# Altium PCB TSAL23.PcbDoc
Units mm, origin at the board's own origin, x right, y up, seen from the top; angles counter-clockwise.
Board outline 52.07 x 66.86 mm, 2 copper layers (Top Layer, Bottom Layer); 41 components, 43 nets, 187 pads, 52 vias.
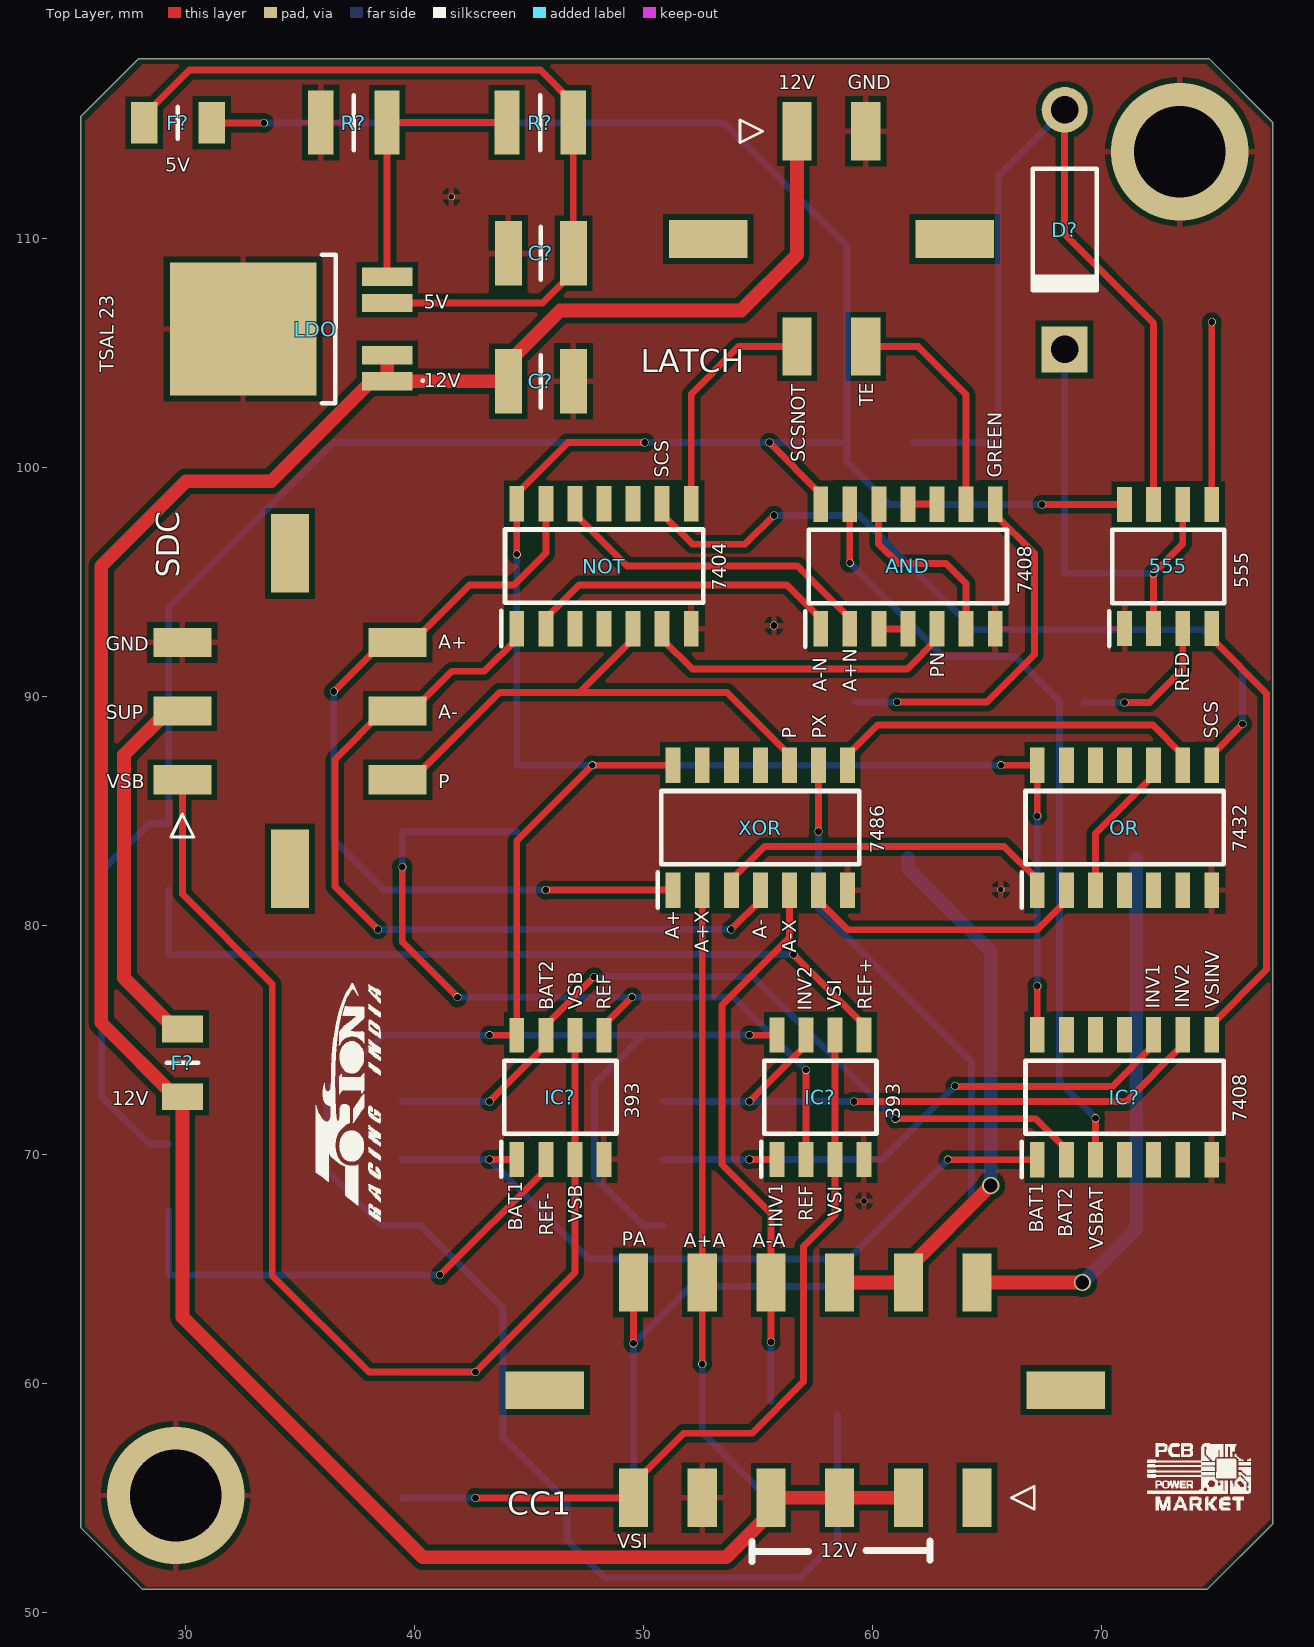
[diagram p0: Top Layer view]
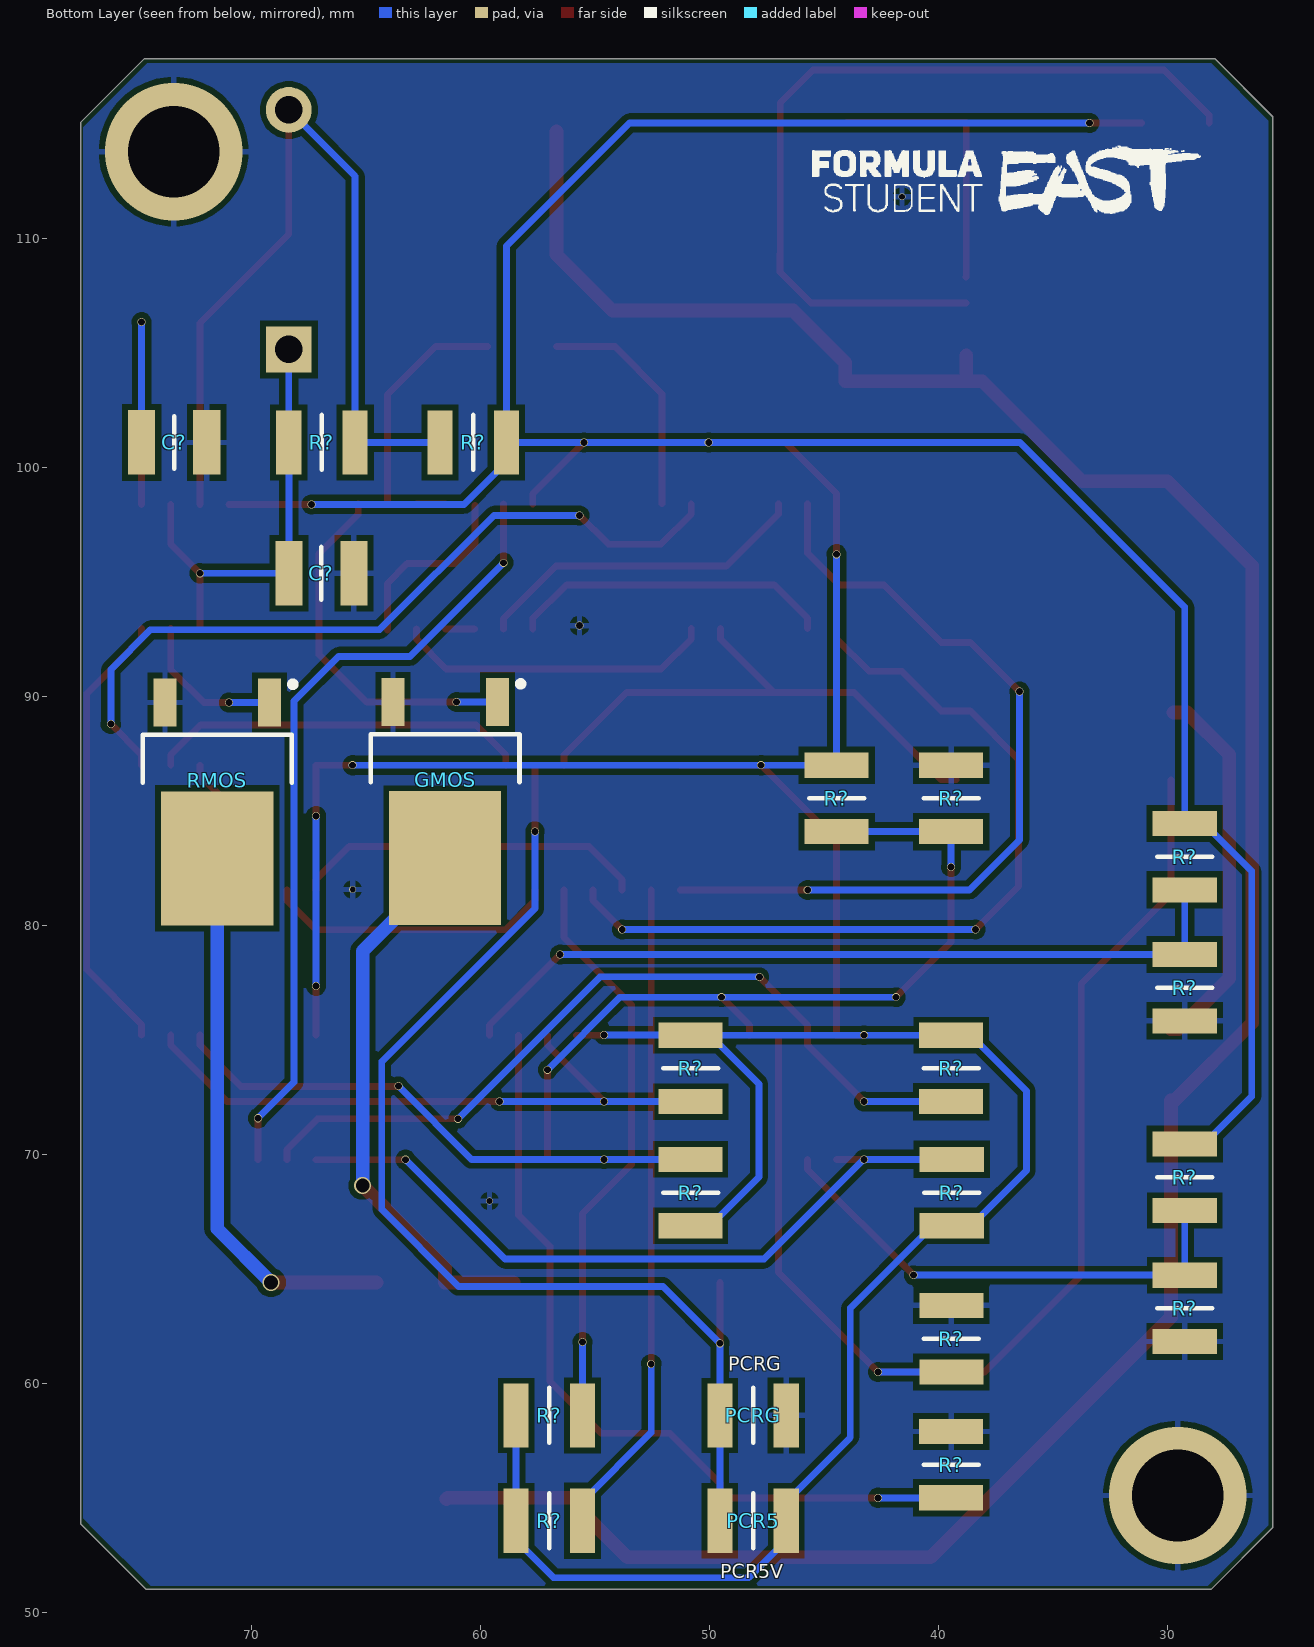
[diagram p1: Bottom Layer view, seen from below]
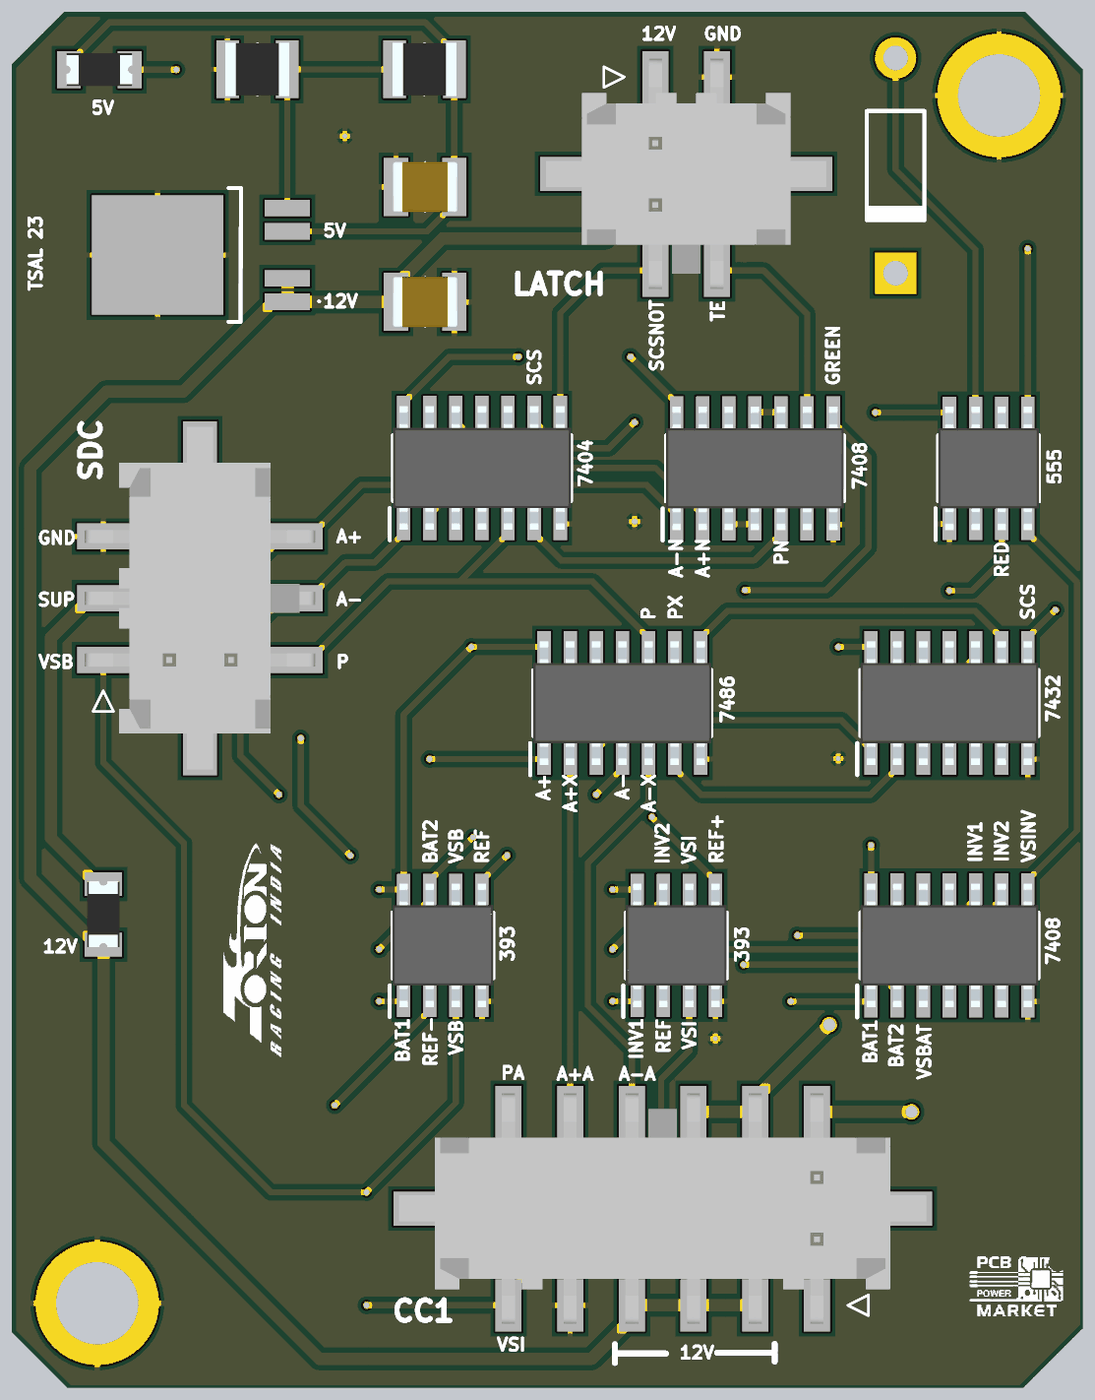
[diagram p2: 3D render of the assembled board from above, using the file's embedded part models]
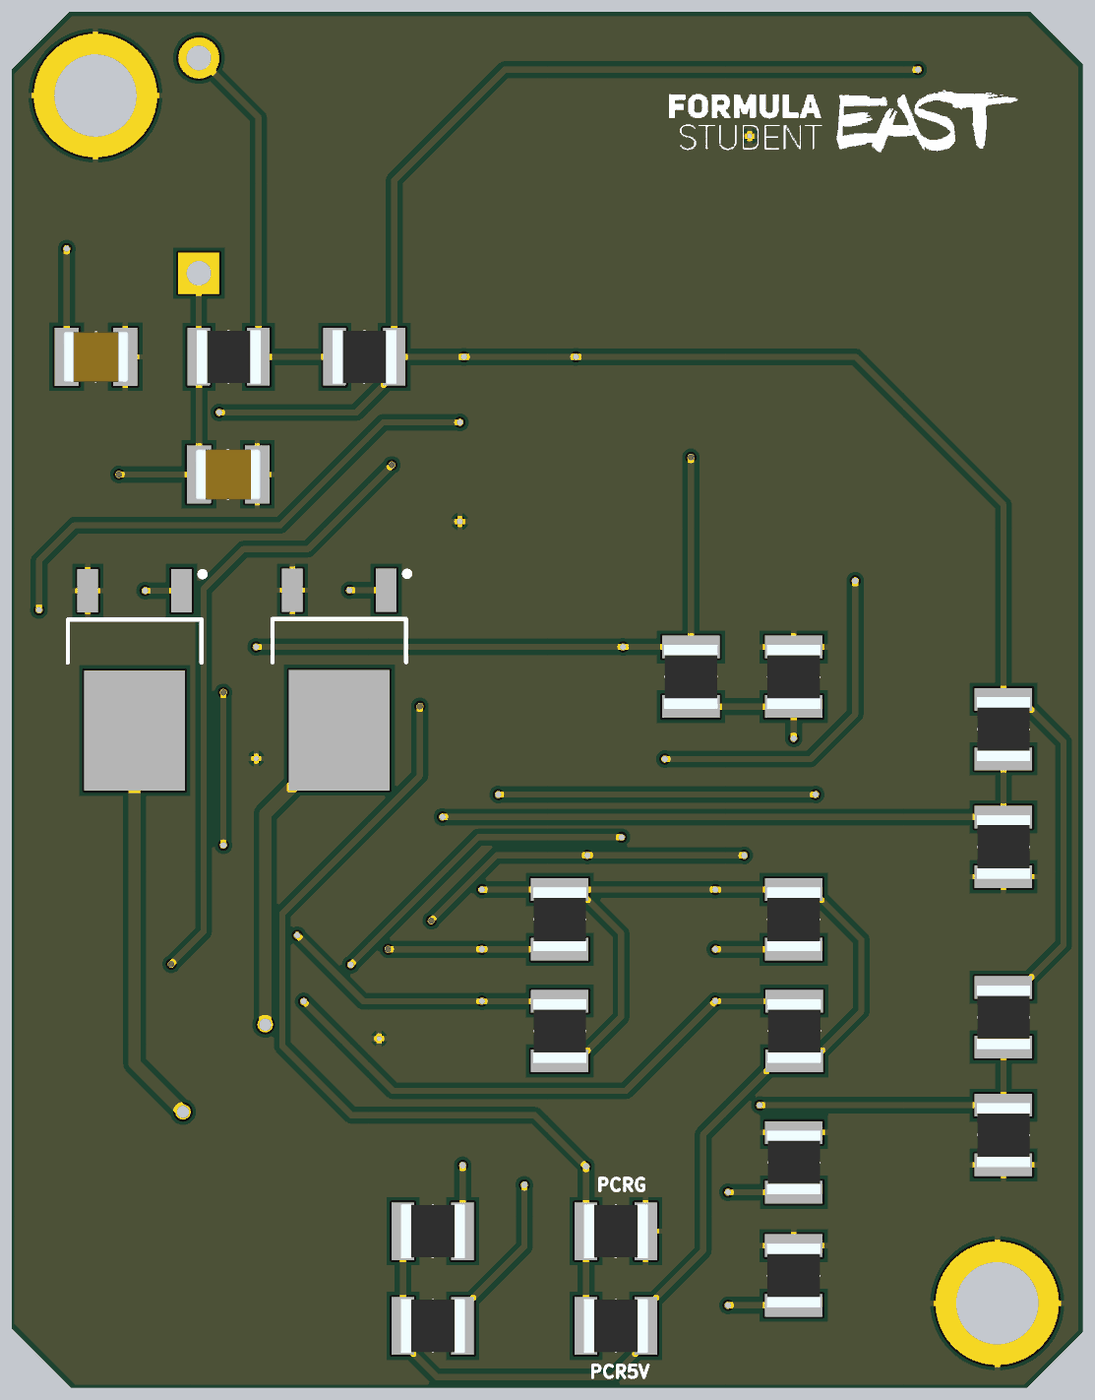
[diagram p3: 3D render of the assembled board from below, using the file's embedded part models]

## Layer stack, top to bottom
Top Solder: solder mask 0.0102, Solder Resist, Dk 3.5
Top Layer: signal copper 0.0356
Dielectric 1: dielectric 0.32, FR-4, Dk 4.8
Bottom Layer: signal copper 0.0356
Bottom Solder: solder mask 0.0102, Solder Resist, Dk 3.5

## Board outline
74.6,51 77.45,53.85 77.47,53.85 77.47,115.062 74.676,117.856 27.94,117.856 25.4,115.316 25.4,53.7 28.1,51

## Design rules (kind name [scope] priority, off if disabled: settings)
Clearance [All] p1: gap=0.254 ignorepadtopadclearanceinfootprint=FALSE except(0: Arc-Hole Track-Hole SMDPad-Hole THPad-Hole Via-Hole Fill-Hole Poly-Hole Region-Hole Text-Hole)
PolygonConnect [All] p1: connectstyle=Relief reliefconductorwidth=0.254 reliefentries=4 polygonreliefangle="90 Angle" airgapwidth=0.254
RoutingVias [All] p1: holewidth=0.3 width=0.35 viastyle="Through Hole" minholewidth=0.3 minwidth=0.35 maxholewidth=0.3 maxwidth=0.35
SolderMaskExpansion [All] p1: expansion=0.102 istentingtop=FALSE
Width [All] p1: maxlimit=0.6 minlimit=0.3 preferedwidth=0.6
30 further rules are at their usual default settings.

## Classes and differential pairs
component class TSAL23: 555 AND C? CC1 D? F? GMOS IC? LATCH LDO NOT OR PCR5 PCRG R? RMOS SDC XOR

## Components (designator, comment, footprint, x,y, rotation, side; value= is the part's Value field where it differs from the comment)
555 "NE555DRG4" SOIC127P600X175-8N 72.898,95.676 r90 top
AND "MC74HC08ADG" SOIC127P600X175-14N 61.534,95.676 r90 top
C? "10uF" CAPC3225X145N 45.5,109.35 r180 top
C? "10uF" CAPC3225X145N 45.5,103.759 r0 top
C? "0.1uF" CAPC3225X145N 73.381,101.092 r0 bottom
C? "10uF" CAPC3225X145N 66.954,95.377 r0 bottom
CC1 "43045-1219" 43045-12YY_181920 57.05,59.7 r0 top
D? "Diode 1N4007" DO-41 68.377,110.386 r270 top
F? "NANOSMDC020F-2" NANOSMDC016F2 29.65,115.05 r180 top
F? "NANOSMDC020F-2" NANOSMDC016F2 29.85,74 r90 top
GMOS "STD10NF10T4" TO228P972X240-3N 61.55,85.4 r270 bottom
IC? "LM393D" SOIC127P600X175-8N 46.355,72.492 r90 top
IC? "MC74HC08ADG" SOIC127P600X175-14N 70.993,72.492 r90 top
IC? "LM393D" SOIC127P600X175-8N 57.712,72.492 r90 top
LATCH "43045-0419" 43045-04YY_181920 58.19,109.983 r180 top
LDO "TLF1963TEATMA1" TLF1963TEATMA1 34.544,106.045 r90 top
NOT "MC74AC04DG" SOIC127P600X175-14N 48.26,95.689 r90 top
OR "MC74HC32ADG" SOIC127P600X175-14N 70.993,84.27 r90 top
PCR5 "10K" RESC3126X60N 48.1,54 r180 bottom
PCRG "10K" RESC3126X60N 48.1,58.6 r0 bottom
R? "10K" RESC3126X60N 39.45,56.45 r270 bottom
R? "10K" RESC3126X60N 39.442,61.946 r270 bottom
R? "10K" RESC3126X60N 39.449,73.754 r90 bottom
R? "10K" RESC3126X60N 50.828,68.33 r270 bottom
R? "1.2K" RESC3126X60N 29.25,83 r90 bottom
R? "10K" RESC3126X60N 29.25,69 r90 bottom
R? "10K" RESC3126X60N 50.828,73.754 r90 bottom
R? "10K" RESC3126X60N 29.25,77.279 r90 bottom
R? "1.2K" RESC3126X60N 29.25,63.273 r90 bottom
R? "10K" RESC3126X60N 39.423,68.33 r270 bottom
R? "10K" RESC3126X60N 57,58.6 r0 bottom
R? "10K" RESC3126X60N 44.45,85.545 r90 bottom
R? "3.9K" RESC3126X60N 39.449,85.545 r270 bottom
R? "10K" RESC3126X60N 57,54 r0 bottom
R? "220K" RESC3126X60N 66.929,101.092 r180 bottom
R? "10K" RESC3126X60N 45.466,115.062 r0 top
R? "3.3K" RESC3126X60N 37.338,115.062 r180 top
R? "220K" RESC3126X60N 60.325,101.092 r180 bottom
RMOS "STD10NF10T4" TO228P972X240-3N 71.501,85.381 r270 bottom
SDC "43045-0619" 43045-06YY_181920 34.545,89.36 r270 top
XOR "MC74HC86ADG" SOIC127P600X175-14N 55.09,84.27 r90 top

## Footprints (in the part's own frame and the unit in brackets; to place one, negate y for a bottom-side part, rotate by r counter-clockwise, add the part's x,y. Pads: shape width x height; smd on the part's side, far side on the other; paste and mask are expansions set on the pad)
43045-04YY_181920 [mm]
  rect 1.27x2.54 smd: 1(1.5,-4.7) 2(-1.5,-4.7) 3(1.5,4.7) 4(-1.5,4.7)
  rect 3.43x1.65 smd: 5(5.385,0) 6(-5.385,0)
  silkscreen extent 3,-5.2 4,-4.2, body extent -6.83,-5.6 6.83,5.6, height 9.96
43045-06YY_181920 [mm]
  rect 1.27x2.54 smd: 1(3,-4.7) 2(0,-4.7) 3(-3,-4.7) 4(3,4.7) 5(0,4.7) 6(-3,4.7)
  rect 3.43x1.65 smd: 7(6.885,0) 8(-6.885,0)
  silkscreen extent 4.5,-5.2 5.5,-4.2, body extent -8.32,-5.6 8.32,5.6, height 9.96
43045-12YY_181920 [mm]
  rect 1.27x2.54 smd: 1(7.5,-4.7) 2(4.5,-4.7) 3(1.5,-4.7) 4(-1.5,-4.7) 5(-4.5,-4.7) 6(-7.5,-4.7) 7(7.5,4.7) 8(4.5,4.7) 9(1.5,4.7) 10(-1.5,4.7) 11(-4.5,4.7) 12(-7.5,4.7)
  rect 3.43x1.65 smd: 13(11.385,0) 14(-11.385,0)
  silkscreen extent 9,-5.2 10,-4.2, body extent -12.83,-5.6 12.83,5.6, height 9.95
CAPC3225X145N [mm]
  rect 1.18x2.82 smd: 1(-1.42,0) 2(1.42,0)
  silkscreen extent 0,-1.15 0,1.15, body extent -1.6,-1.25 1.6,1.25, height 1.45
DO-41 [mm] "Diode, Axial; Body 5.2 x 2.7 mm (LxDia. max), Lead Dia. 0.86 mm (max)"
  round 2 hole 1.2: 1(-5.23,0)
  rect 2x2 hole 1.2: 2(5.23,0)
  silkscreen extent -2.65,-1.4 2.75,1.4
NANOSMDC016F2 [mm]
  rect 1.16x1.81 smd: 1(-1.475,0) 2(1.475,0)
  silkscreen extent 0,-0.69 0,0.69, body extent -1.6,-0.79 1.6,0.79, height 0.82
RESC3126X60N [mm]
  rect 1.1x2.8 smd: 1(-1.45,0) 2(1.45,0)
  silkscreen extent 0,-1.2 0,1.2, body extent -1.55,-1.3 1.55,1.3, height 0.6
SOIC127P600X175-8N [mm]
  rect 1.525x0.65 smd: 1(-2.712,1.905) 2(-2.712,0.635) 3(-2.712,-0.635) 4(-2.712,-1.905) 5(2.712,-1.905) 6(2.712,-0.635) 7(2.712,0.635) 8(2.712,1.905)
  silkscreen extent -3.47,-2.45 1.6,2.58, body extent -3,-2.45 3,2.45, height 1.75
SOIC127P600X175-14N [mm]
  rect 1.55x0.65 smd: 1(-2.725,3.81) 2(-2.725,2.54) 3(-2.725,1.27) 4(-2.725,0) 5(-2.725,-1.27) 6(-2.725,-2.54) 7(-2.725,-3.81) 8(2.725,-3.81) 9(2.725,-2.54) 10(2.725,-1.27) 11(2.725,0) 12(2.725,1.27) 13(2.725,2.54) 14(2.725,3.81)
  silkscreen extent -3.5,-4.33 1.6,4.48, body extent -3,-4.33 3,4.33, height 1.75
TLF1963TEATMA1 [mm]
  rect 0.8x2.2 smd: 1(-2.28,-4.25) 2(-1.14,-4.25) 4(1.14,-4.25) 5(2.28,-4.25)
  rect 5.8x6.4 smd: 3(0,2.05)
  silkscreen extent -3.25,-5.85 3.25,-1.4
TO228P972X240-3N [mm]
  rect 2.1x1 smd: 1(-4.35,2.28) 3(-4.35,-2.28)
  rect 5.85x4.9 smd: 4(2.45,0)
  silkscreen extent -5.27,-3.25 -0.85,3.42

## Part data
555: "Integrated Circuit", Manufacturer_Name="Texas Instruments", Mouser Part Number=595-NE555DRG4, Arrow Part Number=NE555DRG4, Arrow Price/Stock=https://www.arrow.com/en/products/ne555drg4/texas-instruments?region=nac, Datasheet Link=http://www.mouser.com/ds/2/405/ne555-557499.pdf, Height=1.75mm, Manufacturer_Part_Number=NE555DRG4, Mouser Price/Stock=https://www.mouser.co.uk/ProductDetail/Texas-Instruments/NE555DRG4?qs=rLYyFdxB%2FmreBHawQCpQ0Q%3D%3D
AND IC?: "Integrated Circuit", Manufacturer_Name="ON Semiconductor", Mouser Part Number=863-MC74HC08ADG, Arrow Part Number=MC74HC08ADG, Arrow Price/Stock=https://www.arrow.com/en/products/mc74hc08adg/on-semiconductor, Datasheet Link=http://www.onsemi.com/pub/Collateral/MC74HC08A-D.PDF, Height=1.75mm, Manufacturer_Part_Number=MC74HC08ADG, Mouser Price/Stock=https://www.mouser.co.uk/ProductDetail/ON-Semiconductor/MC74HC08ADG?qs=qg33o%252B8vzFqW0duu5mW%2FLA%3D%3D
C? C? C? C?: library part CC1210KKX7R8BB105, "Capacitor", Manufacturer_Name="YAGEO (PHYCOMP)", Mouser Part Number=603-CC121KKX7R8BB105, Arrow Part Number=CC1210KKX7R8BB105, Arrow Price/Stock=https://www.arrow.com/en/products/cc1210kkx7r8bb105/yageo?region=nac, Datasheet Link=https://datasheet.datasheetarchive.com/originals/distributors/Datasheets_SAMA/d9f127a4875522309d99aa7dec79633c.pdf, Height=1.45mm, Manufacturer_Part_Number=CC1210KKX7R8BB105, Mouser Price/Stock=https://www.mouser.com/Search/Refine.aspx?Keyword=603-CC121KKX7R8BB105
CC1: "Connector", Manufacturer_Name=Molex, Mouser Part Number=538-43045-1219, Datasheet Link=https://www.molex.com/pdm_docs/sd/430450218_sd.pdf, Height=9.91mm, Manufacturer_Part_Number=43045-1219, Mouser Price/Stock=https://www.mouser.co.uk/ProductDetail/Molex/43045-1219?qs=359VwiUTsp3iCU2NVYxNVg%3D%3D
D?: "1 Amp General Purpose Rectifier", Code_JEDEC=DO-204-AL, ComponentLink1Description="Manufacturer Link", ComponentLink1URL=http://www.fairchildsemi.com/, ComponentLink2Description=Datasheet, ComponentLink2URL=http://www.fairchildsemi.com/ds/1N%2F1N4001.pdf, DatasheetVersion=1998, LatestRevisionDate=17-Jul-2002, LatestRevisionNote="Re-released for DXP Platform.", PackageDescription="Diode, Axial; Body 5.2 x 2.7 mm (LxDia. max), Lead Dia. 0.86 mm (max)", PackageReference=DO-41, PackageVersion=Aug-1999, Published=8-Jun-2000, Publisher="Altium Limited"
F? F?: "Resettable Fuse", Manufacturer_Name=LITTELFUSE, Mouser Part Number=650-NANOSMDC020F-2, Arrow Part Number=NANOSMDC020F-2, Arrow Price/Stock=https://www.arrow.com/en/products/nanosmdc020f-2/littelfuse, Datasheet Link=https://www.littelfuse.com/~/media/electronics/datasheets/resettable_ptcs/littelfuse_ptc_nanosmdc_datasheet.pdf.pdf, Height=1mm, Manufacturer_Part_Number=NANOSMDC020F-2, Mouser Price/Stock=https://www.mouser.co.uk/ProductDetail/Littelfuse/NANOSMDC020F-2?qs=iK0evp%252BCRRU6agwMt7HYjg%3D%3D
GMOS RMOS: "Integrated Circuit", Manufacturer_Name=STMicroelectronics, Mouser Part Number=511-STD10NF10, Arrow Part Number=STD10NF10T4, Arrow Price/Stock=https://www.arrow.com/en/products/std10nf10t4/stmicroelectronics, Datasheet Link=http://www.st.com/web/en/resource/technical/document/datasheet/CD00002133.pdf, Height=2.4mm, Manufacturer_Part_Number=STD10NF10T4, Mouser Price/Stock=https://www.mouser.co.uk/ProductDetail/STMicroelectronics/STD10NF10T4?qs=El1T93pd01%2FBh%252BX9NfIsIQ%3D%3D
IC? IC?: "Integrated Circuit", Manufacturer_Name=STMicroelectronics, Mouser Part Number=511-LM393D, Arrow Part Number=LM393D, Arrow Price/Stock=https://www.arrow.com/en/products/lm393d/stmicroelectronics?region=europe, Datasheet Link=http://www.st.com/st-web-ui/static/active/en/resource/technical/document/datasheet/CD00000465.pdf, Height=1.75mm, Manufacturer_Part_Number=LM393D, Mouser Price/Stock=https://www.mouser.co.uk/ProductDetail/STMicroelectronics/LM393D?qs=htKRmzjvioSpfPyLiLnV1A%3D%3D
LATCH: "Connector", Manufacturer_Name=Molex, Mouser Part Number=538-43045-0419, Datasheet Link=https://www.molex.com/pdm_docs/sd/430450218_sd.pdf, Height=9.91mm, Manufacturer_Part_Number=43045-0419, Mouser Price/Stock=https://www.mouser.co.uk/ProductDetail/Molex/43045-0419?qs=UeCeOHRHQebVNIQyI9VWWg%3D%3D
LDO: "Integrated Circuit", Manufacturer_Name=Infineon, Mouser Part Number=726-TLF1963TEATMA1, Arrow Part Number=TLF1963TEATMA1, Arrow Price/Stock=https://www.arrow.com/en/products/tlf1963teatma1/infineon-technologies-ag?region=nac, Datasheet Link=https://www.infineon.com/dgdl/Infineon-TLF1963-DS-v01_00-EN.pdf?fileId=5546d46258fc0bc1015969d2981941e0, Height=2.35mm, Manufacturer_Part_Number=TLF1963TEATMA1, Mouser Price/Stock=https://www.mouser.co.uk/ProductDetail/Infineon-Technologies/TLF1963TEATMA1?qs=SiyfpgnvCZluIGE%2FbZiglw%3D%3D
NOT: "Integrated Circuit", Manufacturer_Name="ON Semiconductor", Mouser Part Number=863-MC74AC04DG, Arrow Part Number=MC74AC04DG, Arrow Price/Stock=https://www.arrow.com/en/products/mc74ac04dg/on-semiconductor, Datasheet Link=https://www.onsemi.com/pub/Collateral/MC74AC04-D.PDF, Height=1.75mm, Manufacturer_Part_Number=MC74AC04DG, Mouser Price/Stock=https://www.mouser.co.uk/ProductDetail/ON-Semiconductor/MC74AC04DG?qs=dFKnUM%2FquJbTyBC81Rgreg%3D%3D
OR: "Integrated Circuit", Manufacturer_Name="ON Semiconductor", Mouser Part Number=863-MC74HC32ADG, Arrow Part Number=MC74HC32ADG, Arrow Price/Stock=https://www.arrow.com/en/products/mc74hc32adg/on-semiconductor, Datasheet Link=http://www.onsemi.com/pub/Collateral/MC74HC32A-D.PDF, Height=1.75mm, Manufacturer_Part_Number=MC74HC32ADG, Mouser Price/Stock=https://www.mouser.co.uk/ProductDetail/ON-Semiconductor/MC74HC32ADG?qs=qg33o%252B8vzFqwIcd4MqFgRQ%3D%3D
PCR5 PCRG R? R? R? R? R? R? R? R? R? R? R? R? R? R? R? R? R? R?: library part RC1210JR-070RL, "Resistor", Manufacturer_Name="YAGEO (PHYCOMP)", Mouser Part Number=603-RC1210JR-070RL, Arrow Part Number=RC1210JR-070RL, Arrow Price/Stock=https://www.arrow.com/en/products/rc1210jr-070rl/yageo, Datasheet Link=https://datasheet.datasheetarchive.com/originals/distributors/Datasheets_SAMA/902f9e387b938f871d31120f5fc1d65e.pdf, Height=0.6mm, Manufacturer_Part_Number=RC1210JR-070RL, Mouser Price/Stock=https://www.mouser.co.uk/ProductDetail/YAGEO/RC1210JR-070RL?qs=eVUp2xEqV%2FtpfK61W3Q4CQ%3D%3D
SDC: "Connector", Manufacturer_Name=Molex, Mouser Part Number=538-43045-0619, Arrow Part Number=43045-0619, Arrow Price/Stock=https://www.arrow.com/en/products/43045-0619/molex, Datasheet Link=https://www.molex.com/pdm_docs/sd/430450218_sd.pdf, Height=9.91mm, Manufacturer_Part_Number=43045-0619, Mouser Price/Stock=https://www.mouser.co.uk/ProductDetail/Molex/43045-0619?qs=KC2ywxza1kr7EVu5MuTw7g%3D%3D
XOR: "Integrated Circuit", Manufacturer_Name=onsemi, Mouser Part Number=863-MC74HC86ADG, Datasheet Link=https://www.onsemi.com/pub/Collateral/MC74HC86A-D.PDF, Height=1.75mm, Manufacturer_Part_Number=MC74HC86ADG, Mouser Price/Stock=https://www.mouser.co.uk/ProductDetail/onsemi/MC74HC86ADG?qs=qg33o%252B8vzFo7NVdnNP3ThA%3D%3D

## Via types
v1: diameter 0.35, hole 0.3, Top Layer to Bottom Layer, 45 vias
v2: diameter 0.3, hole 0.25, Top Layer to Bottom Layer, 3 vias
v3: diameter 0.75, hole 0.6, Top Layer to Bottom Layer, 2 vias
v4: diameter 6, hole 4, Top Layer to Bottom Layer, 2 vias

## Nets (pads, with @x,y where several pads share a name; then routed paths per layer and width w, separated by ;. In a path a pad name is that pad's centre, name@x,y a point inside that pad or via, vN(x,y) a via of type N, cw(c..) or ccw(c..) an arc to the next point about the centre after c; other vN are vias at no path point)
5V: C?.1@46.92,109.35 F?.2@28.175,115.05 LDO.4 R?.2@46.916,115.062 | length 36.5
  Top Layer w0.3: F?.2@28.175,115.05 28.175,115.375 30.15,117.35 45.478,117.35 46.916,115.912 46.916,109.354 46.92,109.35 46.92,108.53 45.575,107.185 LDO.4
+5: 555.8 AND.14 F?.1@31.125,115.05 IC?.8@44.45,75.204 IC?.8@55.807,75.204 IC?.14 NOT.14 OR.14 PCR5.2 R?.2@29.25,70.45 R?.2@29.25,84.45 R?.2@39.423,66.88 R?.2@39.449,75.204 R?.2@44.45,86.995 R?.2@50.828,66.88 R?.2@50.828,75.204 R?.2@58.45,54 R?.2@58.45,58.6 R?.2@58.875,101.092 XOR.14 | length 261.4
  Top Layer w0.3: F?.1@31.125,115.05 v1(33.4,115.05) ; v1(43.258,75.204) 44.45,75.204 44.45,83.697 v1(47.748,86.995) XOR.14 ; v1(44.45,96.207) NOT.14 44.45,98.864 46.678,101.092 v1(50.038,101.092) ; v1(54.614,75.208) 54.618,75.204 IC?.8@55.807,75.204 ; v1(55.483,101.092) 57.724,98.851 AND.14 ; v1(65.59,86.995) OR.14 v1(67.183,84.784) ; IC?.14 v1(67.183,77.36) ; v1(67.386,98.388) 555.8
  Bottom Layer w0.3: R?.2@29.25,70.45 28.4,70.45 26.323,72.527 26.323,82.373 28.4,84.45 29.25,84.45 29.25,93.9 36.442,101.092 v1(50.038,101.092) v1(55.483,101.092) R?.2@58.875,101.092 ; v1(33.4,115.05) 53.5,115.05 58.875,109.675 R?.2@58.875,101.092 ; R?.2@39.449,75.204 v1(43.258,75.204) R?.2@49.977,75.204 ; R?.2@39.449,75.204 38.599,75.204 36.157,72.762 36.157,69.296 38.573,66.88 39.423,66.88 40.273,66.88 43.855,63.298 43.855,57.645 46.65,54.85 PCR5.2 46.65,53.15 48.289,51.511 56.811,51.511 58.45,53.15 58.45,54 R?.2@58.45,58.6 ; v1(44.45,96.207) 44.45,86.995 v1@65.612,86.995 ; R?.2@50.827,75.204 R?.2@49.977,75.204 ; R?.2@50.828,66.88 49.978,66.88 47.841,69.017 47.841,73.067 R?.2@49.977,75.204 ; R?.2@50.828,75.204 50.831,75.208 v1(54.614,75.208) ; v1(67.183,77.36) v1(67.183,84.784) ; v1(67.386,98.388) 60.729,98.388 58.875,100.242 R?.2@58.875,101.092
+12: C?.1@44.08,103.759 CC1.2 CC1.3 CC1.4 F?.1@29.85,72.525 LATCH.1 LDO.1 LDO.2 | length 114.8
  Top Layer w0.6: LDO.2 LDO.1 ; LATCH.1 56.69,109.29 54.25,106.85 46.351,106.85 44.08,104.579 44.08,103.759 44.074,103.765 LDO.1 ; CC1.3@58.5,55 CC1.4 55.55,54.365 53.585,52.4 40.35,52.4 29.85,62.9 29.85,72.35 29.7,72.35 26.3,75.75 26.3,95.7 30,99.4 33.729,99.4 38.094,103.765 LDO.1 ; CC1.3 61.45,55 CC1.2@61.5,54.95
"AIR OR": OR.3 OR.10 | length 6.5
  Top Layer w0.3: OR.3 69.723,84.005 72.263,86.545 OR.10
"AIR+VE 5V": NOT.13 SDC.6 XOR.1 | length 36.1
  Top Layer w0.3: v1(36.459,90.209) 38.61,92.36 SDC.6 39.88,92.36 42.389,94.869 44.323,94.869 45.72,96.266 NOT.13 ; v1(45.715,81.545) XOR.1
  Bottom Layer w0.3: v1(36.459,90.209) 36.459,83.73 38.644,81.545 v1(45.715,81.545)
"AIR+VE AUX": CC1.11 R?.1@55.55,54 XOR.2 | length 28.9
  Top Layer w0.3: v1(52.55,60.85) CC1.11 XOR.2
  Bottom Layer w0.3: v1(52.55,60.85) 52.55,57.85 55.55,54.85 55.55,54 R?.1@55.55,53.85
"AIR+VE NOT": AND.2 NOT.12 | length 14.8
  Top Layer w0.3: NOT.12 46.99,97.964 49.265,95.689 56.706,95.689 58.994,93.401 AND.2
"AIR+VE XOR": OR.1 XOR.3 | length 15.5
  Top Layer w0.3: XOR.3 53.82,81.995 55.264,83.439 65.739,83.439 67.183,81.995 OR.1
"AIR-VE AUX": CC1.10 R?.1@55.55,58.6 XOR.5 | length 24.5
  Top Layer w0.3: v1(55.55,61.8) CC1.10 55.55,67.419 53.412,69.558 53.412,76.519 56.36,79.467 XOR.5
  Bottom Layer w0.3: R?.1@55.55,59.2 v1(55.55,61.8)
"AIR-VE NOT": AND.1 NOT.2 | length 14.1
  Top Layer w0.3: NOT.2 45.72,93.414 47.175,94.869 56.256,94.869 57.724,93.401 AND.1
"AIR-VE XOR": OR.2 XOR.6 | length 12.8
  Top Layer w0.3: XOR.6 57.63,81.095 58.917,79.808 67.166,79.808 68.453,81.095 OR.2
BAT1: IC?.1@44.45,69.78 IC?.1@67.183,69.767 R?.1@39.423,69.78 | length 32.5
  Top Layer w0.3: v1(43.258,69.78) IC?.1@44.45,69.78 ; v1(63.281,69.767) IC?.1@67.183,69.767
  Bottom Layer w0.3: R?.1@39.423,69.78 v1(43.258,69.78) ; v1@43.268,69.77 47.612,65.425 58.939,65.425 v1(63.281,69.767)
BAT2: IC?.2@68.453,69.767 IC?.7@45.72,75.204 R?.1@39.449,72.304 | length 35.3
  Top Layer w0.3: v1(43.258,72.304) 45.72,74.766 45.72,75.204 45.72,75.641 v1(47.826,77.747) ; v1(60.986,71.553) 67.117,71.553 68.453,70.217 IC?.2@68.453,69.767
  Bottom Layer w0.3: R?.1@39.449,72.304 v1(43.258,72.304) ; v1(47.826,77.747) 47.835,77.756 54.783,77.756 v1(60.986,71.553)
GND: 555.1 AND.7 C?.1@65.534,95.377 C?.1@71.961,101.092 C?.2@44.08,109.35 C?.2@46.92,103.759 CC1.5 GMOS.3 IC?.4@48.26,69.78 IC?.4@59.617,69.78 IC?.7@74.803,69.767 LATCH.2 LDO.3 NOT.7 OR.7 PCRG.1 R?.1@29.25,61.823 R?.1@29.25,75.829 R?.1@39.45,57.9 R?.1@39.442,63.396 R?.1@39.449,86.995 R?.2@35.888,115.062 RMOS.3 SDC.3 XOR.7
  other v1: 55.684,93.091
  other v2: 59.611,67.964 65.59,81.57 41.593,111.823
  other v4: 29.55,55.1 73.406,113.792
GREEN: AND.8 GMOS.1 | length 16
  Top Layer w0.3: v1(61.05,89.75) 64.985,89.75 67.056,91.821 67.056,96.239 65.344,97.951 AND.8
  Bottom Layer w0.3: GMOS.1@59.25,89.75 v1(61.05,89.75)
INV1: IC?.1@55.807,69.78 IC?.10 R?.1@50.828,69.78 | length 25.2
  Top Layer w0.3: v1(54.614,69.78) IC?.1@55.807,69.78 ; v1(63.592,72.979) 63.601,72.97 70.466,72.97 72.263,74.767 IC?.10
  Bottom Layer w0.3: R?.1@50.828,69.78 60.393,69.78 v1(63.592,72.979)
INV2: IC?.7@57.077,75.204 IC?.9 R?.1@50.828,72.304 | length 28.1
  Top Layer w0.3: v1(54.614,72.304) 57.077,74.767 IC?.7@57.077,75.204 ; v1(59.171,72.304) 71.07,72.304 73.533,74.767 IC?.9
  Bottom Layer w0.3: R?.1@50.828,72.304 v1(54.614,72.304) v1(59.171,72.304)
LVMS: F?.2@29.85,75.475 SDC.2 | length 16.4
  Top Layer w0.6: SDC.2@29.75,89.3 29.15,89.3 27.3,87.45 27.3,77.7 29.525,75.475 F?.2@29.85,75.475
"M5 5V": NOT.1 SDC.5 XOR.4 | length 36.5
  Top Layer w0.3: v1(38.387,79.82) 36.503,81.704 36.503,87.253 38.61,89.36 SDC.5 39.88,89.36 41.62,91.1 43.036,91.1 44.45,92.514 NOT.1 ; v1(53.815,79.82) 55.09,81.095 XOR.4
  Bottom Layer w0.3: v1(38.387,79.82) v1(53.815,79.82)
Net555_5: 555.5 C?.2@74.801,101.092 | length 13.2
  Top Layer w0.3: 555.5 v1(74.803,106.347)
  Bottom Layer w0.3: C?.2@74.801,101.092 74.803,101.094 v1(74.803,106.347)
Net555_7: 555.7 D?.1 R?.1@61.775,101.092 R?.2@65.479,101.092 | length 38.3
  Top Layer w0.3: D?.1 68.377,110.185 72.263,106.299 555.7
  Bottom Layer w0.3: R?.1@61.775,101.092 65.479,101.092 65.479,112.718 D?.1
NetAND_3: AND.3 AND.4 | length 1.3
  Top Layer w0.3: AND.3 AND.4
NetAND_6: AND.6 AND.12 | length 8.2
  Top Layer w0.3: AND.12@60.253,98.346 60.253,96.664 61.117,95.8 63.204,95.8 64.074,94.93 AND.6@64.074,92.907
NetAND_10: AND.10 AND.11 | length 1.3
  Top Layer w0.3: AND.11 AND.10
NetLDO_5: LDO.5 R?.1@38.788,115.062 R?.1@44.016,115.062 | length 12
  Top Layer w0.3: LDO.5 38.788,108.331 38.788,115.062 R?.1@44.016,115.062
"PCR 5V": NOT.5 SDC.4 XOR.10 | length 24
  Top Layer w0.3: SDC.4 39.88,86.36 40.365,86.845 40.365,86.847 43.695,90.177 47.193,90.177 ; NOT.5 49.53,92.514 47.193,90.177 ; XOR.10 56.36,87.445 53.628,90.177 47.193,90.177
"PCR AUX": CC1.12 PCR5.1 PCRG.2 XOR.9 | length 49.8
  Top Layer w0.3: v1(49.55,61.75) CC1.12 ; v1(57.63,84.109) XOR.9
  Bottom Layer w0.3: PCR5.1 PCRG.2 v1(49.55,61.75) 52.034,64.234 60.959,64.234 64.316,67.591 64.316,74.056 57.63,80.742 v1(57.63,84.109)
"PCR NOT": AND.5 NOT.6 | length 14
  Top Layer w0.3: NOT.6 50.8,92.514 52.114,91.2 61.503,91.2 62.804,92.501 AND.5
"PCR XOR": OR.9 XOR.8 | length 16.6
  Top Layer w0.3: XOR.8 58.9,87.445 60.205,88.75 72.228,88.75 73.533,87.445 OR.9
RED: 555.3 RMOS.1 | length 6.7
  Top Layer w0.3: v1(70.993,89.731) 72.078,89.731 73.533,91.186 555.3
  Bottom Layer w0.3: RMOS.1 v1(70.993,89.731)
REF: IC?.2@57.077,69.78 IC?.5@48.26,75.204 R?.1@44.45,84.095 R?.2@39.449,84.095 | length 35.8
  Top Layer w0.3: v1(39.449,82.55) 39.449,79.272 v1(41.858,76.863) ; IC?.5@48.26,75.204 48.26,75.641 v1(49.482,76.863) ; IC?.2@57.077,69.78 v1(57.077,73.693)
  Bottom Layer w0.3: v1(39.449,82.55) 39.449,84.095 R?.1@44.45,84.095 ; v1(41.858,76.863) v1(49.482,76.863) ; v1@49.496,76.863 53.906,76.863 v1(57.077,73.693)
REF+: IC?.5@59.617,75.204 R?.1@29.25,81.55 R?.2@29.25,78.729 | length 34.9
  Top Layer w0.3: v1(56.529,78.729) 59.617,75.641 IC?.5@59.617,75.204
  Bottom Layer w0.3: R?.1@29.25,81.55 29.25,78.729 v1(56.529,78.729)
REF-: IC?.2@45.72,69.78 R?.1@29.25,67.55 R?.2@29.25,64.723 | length 21.6
  Top Layer w0.3: v1(41.101,64.723) 45.72,69.342 IC?.2@45.72,69.78
  Bottom Layer w0.3: R?.1@29.25,67.55 29.25,64.723 v1(41.101,64.723)
SCS: NOT.9 OR.8 | length 34.4
  Top Layer w0.3: NOT.9 50.8,97.964 52.117,96.647 54.422,96.647 v1(55.684,97.909) ; OR.8 74.803,87.445 v1(76.15,88.792)
  Bottom Layer w0.3: v1(55.684,97.909) 59.415,97.909 64.412,92.912 74.417,92.912 76.15,91.18 v1(76.15,88.792)
"SCS NOT": LATCH.3 NOT.8 | length 10.3
  Top Layer w0.3: NOT.8 52.07,103.218 54.135,105.283 LATCH.3
TSALERROR: AND.9 LATCH.4 | length 10
  Top Layer w0.3: LATCH.4 61.976,105.283 64.074,103.185 AND.9
TSALGREEN: CC1.8 CC1.9 GMOS.4 | length 24.5
  Top Layer w0.6: CC1.9 CC1.8 61.55,65.035 v3(65.152,68.637)
  Bottom Layer w0.6: GMOS.4 61.55,82.475 65.152,78.873 v3(65.152,68.637)
TSALRED: CC1.7 RMOS.4 | length 24.1
  Top Layer w0.6: CC1.7 v3(69.15,64.4)
  Bottom Layer w0.6: v3(69.15,64.4) 71.501,66.751 RMOS.4
VS_BAT_IN: IC?.3@46.99,69.78 IC?.6@46.99,75.204 R?.2@39.442,60.496 SDC.1 | length 53.6
  Top Layer w0.3: SDC.1 29.845,81.366 33.77,77.441 33.77,64.714 37.988,60.496 v1(42.644,60.496) 46.99,64.842 46.99,69.78 IC?.6@46.99,75.204
  Bottom Layer w0.3: R?.2@39.442,60.496 v1(42.644,60.496)
VS_INV_IN: CC1.6 IC?.3@58.347,69.78 IC?.6@58.347,75.204 R?.2@39.45,55 | length 35.7
  Top Layer w0.3: v1(42.644,55) CC1.6 49.55,55.635 51.734,57.819 54.724,57.819 56.977,60.073 56.977,65.986 58.347,67.356 58.347,69.78 IC?.6@58.347,75.204
  Bottom Layer w0.3: R?.2@39.45,55 v1(42.644,55)
VSBAT: AND.13 IC?.3@69.723,69.767 | length 34.9
  Top Layer w0.3: v1(58.994,95.836) AND.13 ; IC?.3@69.723,69.767 v1(69.723,71.577)
  Bottom Layer w0.3: v1(58.994,95.836) 63.08,91.75 66.2,91.75 68.15,89.8 68.15,73.15 v1(69.723,71.577)
VSINV: 555.4 IC?.8@74.803,75.217 | length 19.7
  Top Layer w0.3: IC?.8@74.803,75.217 74.803,75.667 77.2,78.064 77.2,90.129 74.803,92.527 555.4
X: 555.2 555.6 C?.2@68.374,95.377 D?.2 R?.1@68.379,101.092 | length 19.6
  Top Layer w0.3: 555.2 v1(72.263,95.377) 73.533,96.647 555.6
  Bottom Layer w0.3: D?.2 68.379,105.154 68.379,101.092 68.374,101.087 68.374,95.377 v1(72.263,95.377)
pads on no net: CC1.1 CC1.13 CC1.14 IC?.4@70.993,69.767 IC?.5@72.263,69.767 IC?.6@73.533,69.767 IC?.11 IC?.12 IC?.13 LATCH.5 LATCH.6 NOT.3 NOT.4 NOT.10 NOT.11 OR.4 OR.5 OR.6 OR.11 OR.12 OR.13 SDC.7 SDC.8 XOR.11 XOR.12 XOR.13

## Polygon pours and split planes (outlines as drawn)
GND on Top Layer "NONET_L-01_P-001" (solid, pour order 0): 28.107,117.615 74.557,117.615 77.357,114.815 77.357,54.065 74.407,51.115 28.257,51.115 25.607,53.765 25.607,115.115
GND on Bottom Layer "NONET_L-01_P-001" (solid, pour order 1): 25.6,53.8 25.6,115.15 28.1,117.65 74.55,117.65 77.35,114.85 77.35,54.1 76.8,53.55 74.4,51.15 28.25,51.15 27.2,52.2

## Silkscreen, mask and mechanical layers (free items; w line width, h text height)
Top Overlay:
  drawing of 55 lines, arcs and shapes, not listed
  text "12V" at 55.862,116.508 h0.6
  text "GND" at 58.894,116.507 h0.6
  text "5V" at 29.104,112.904 h0.6
  text "5V" at 40.386,106.934 h0.6
  text "TSAL 23" at 26.846,104.154 h0.6 r90
  text "12V" at 40.386,103.505 h0.6
  text "TE" at 60.026,102.665 h0.6 r90
  text "SCSNOT" at 57.05,100.222 h0.6 r90
  text "SCS" at 51.096,99.554 h0.6 r90
  text "GREEN" at 65.627,99.545 h0.6 r90
  text "555" at 76.396,94.73 h0.6 r90
  text "7404" at 53.594,94.615 h0.6 r90
  text "7408" at 66.93,94.492 h0.6 r90
  text "A+" at 41.021,92.075 h0.6
  text "GND" at 26.504,92.004 h0.6
  text "PN" at 63.109,90.812 h0.6 r90
  text "A-N" at 57.985,90.213 h0.6 r90
  text "A+N" at 59.288,90.213 h0.6 r90
  text "RED" at 73.824,90.21 h0.6 r90
  text "A-" at 41.021,89.027 h0.6
  text "SUP" at 26.504,89.004 h0.6
  text "P" at 56.646,88.153 h0.6 r90
  text "PX" at 57.964,88.153 h0.6 r90
  text "SCS" at 75.096,88.154 h0.6 r90
  text "VSB" at 26.543,85.979 h0.6
  text "P" at 41.021,85.979 h0.6
  text "7432" at 76.327,83.185 h0.6 r90
  text "7486" at 60.492,83.145 h0.6 r90
  text "A-" at 55.376,79.422 h0.6 r90
  text "A+" at 51.545,79.384 h0.6 r90
  text "A-X" at 56.661,78.808 h0.6 r90
  text "A+X" at 52.838,78.803 h0.6 r90
  text "INV1" at 72.538,76.368 h0.6 r90
  text "INV2" at 73.823,76.382 h0.6 r90
  text "VSINV" at 75.14,76.375 h0.6 r90
  text "VSB" at 47.299,76.317 h0.6 r90
  text "BAT2" at 46.046,76.304 h0.6 r90
  text "REF" at 48.552,76.309 h0.6 r90
  text "VSI" at 58.619,76.304 h0.6 r90
  text "REF+" at 59.95,76.309 h0.6 r90
  text "INV2" at 57.329,76.276 h0.6 r90
  text "12V" at 26.754,72.154 h0.6
  text "393" at 49.796,71.554 h0.6 r90
  text "393" at 61.205,71.523 h0.6 r90
  text "7408" at 76.327,71.398 h0.6 r90
  text "VSI" at 58.645,67.285 h0.6 r90
  text "REF" at 57.378,67.087 h0.6 r90
  text "VSB" at 47.299,67.009 h0.6 r90
  text "INV1" at 56.06,66.791 h0.6 r90
  text "BAT1" at 44.696,66.654 h0.6 r90
  text "BAT1" at 67.437,66.584 h0.6 r90
  text "REF-" at 46.046,66.454 h0.6 r90
  text "BAT2" at 68.699,66.384 h0.6 r90
  text "PA" at 49.033,66 h0.6
  text "A+A" at 51.736,65.954 h0.6
  text "A-A" at 54.757,65.954 h0.6
  text "VSBAT" at 70.061,65.823 h0.6 r90
  text "VSI" at 48.835,52.798 h0.6
  text "12V" at 57.712,52.413 h0.6
Bottom Overlay:
  drawing of 17 lines, arcs and shapes, not listed
  text "PCRG" at 49.185,60.56 h0.6
  text "PCR5V" at 49.527,51.48 h0.6